# EAGLE board MOD-v2-3a (EAGLE 8.3.1)
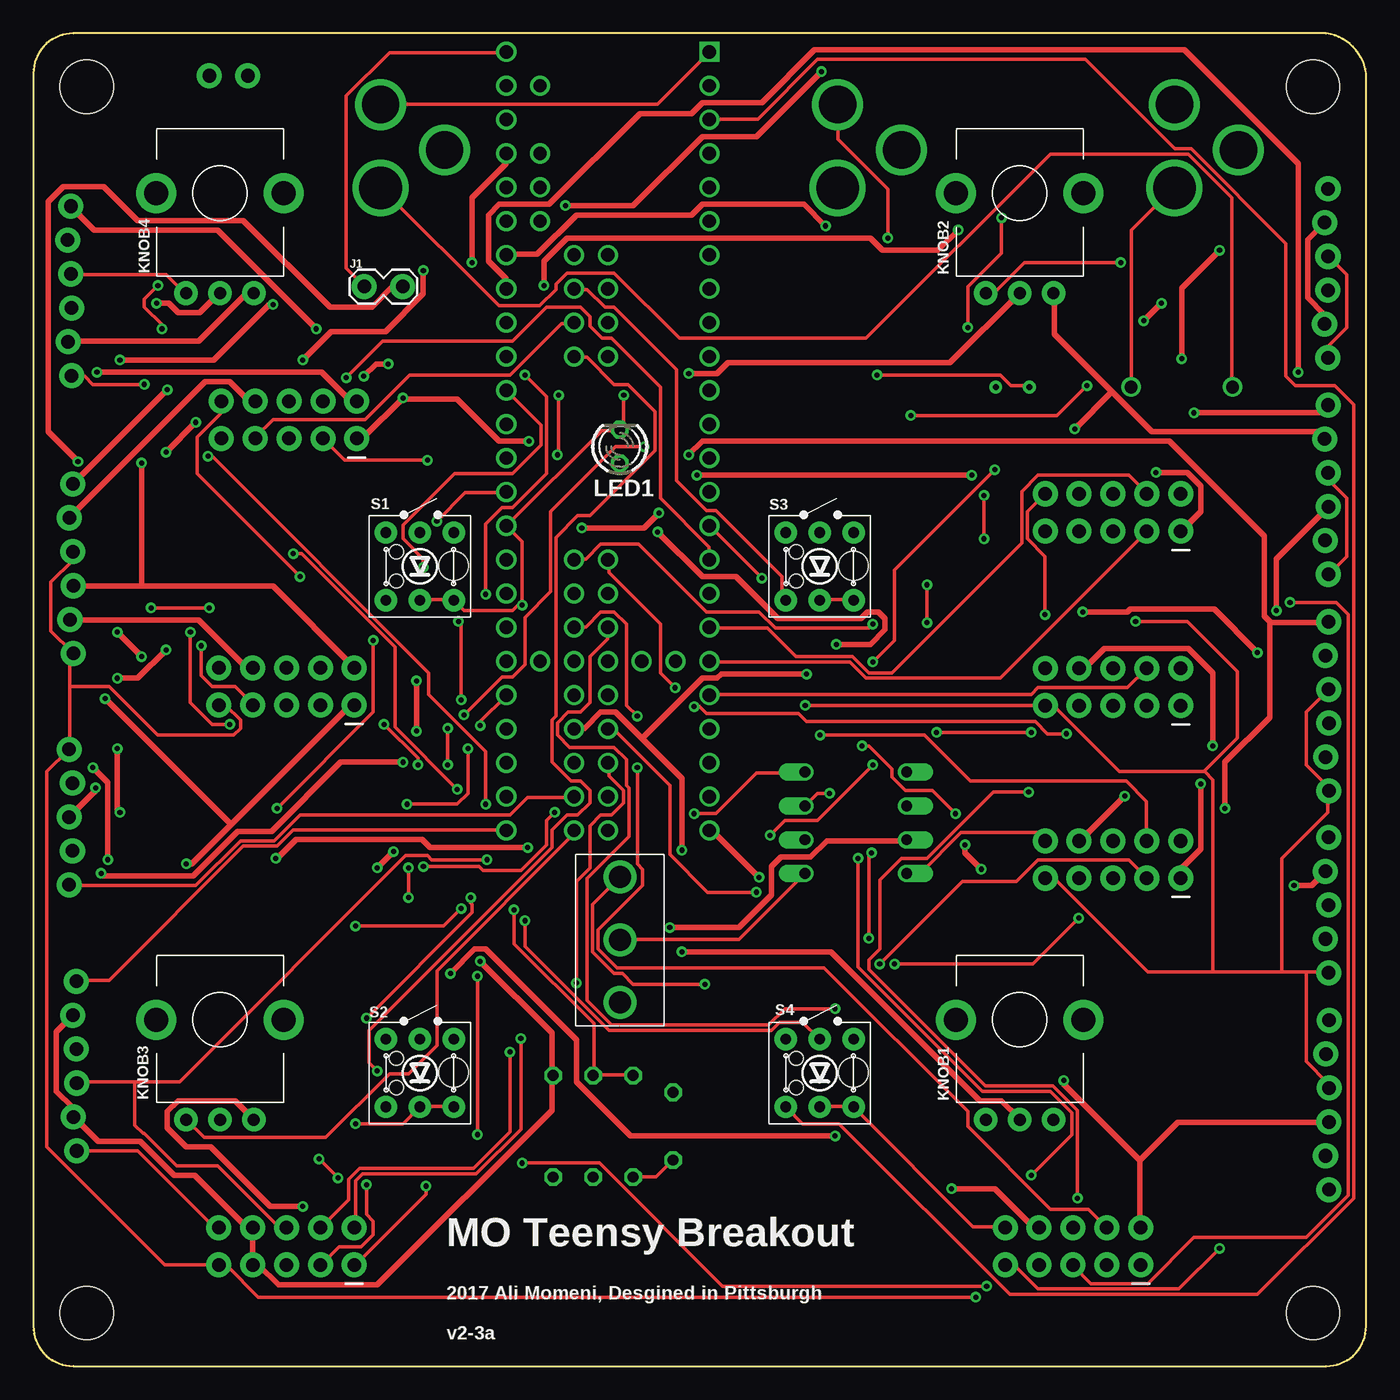
[diagram p0: board, top side]
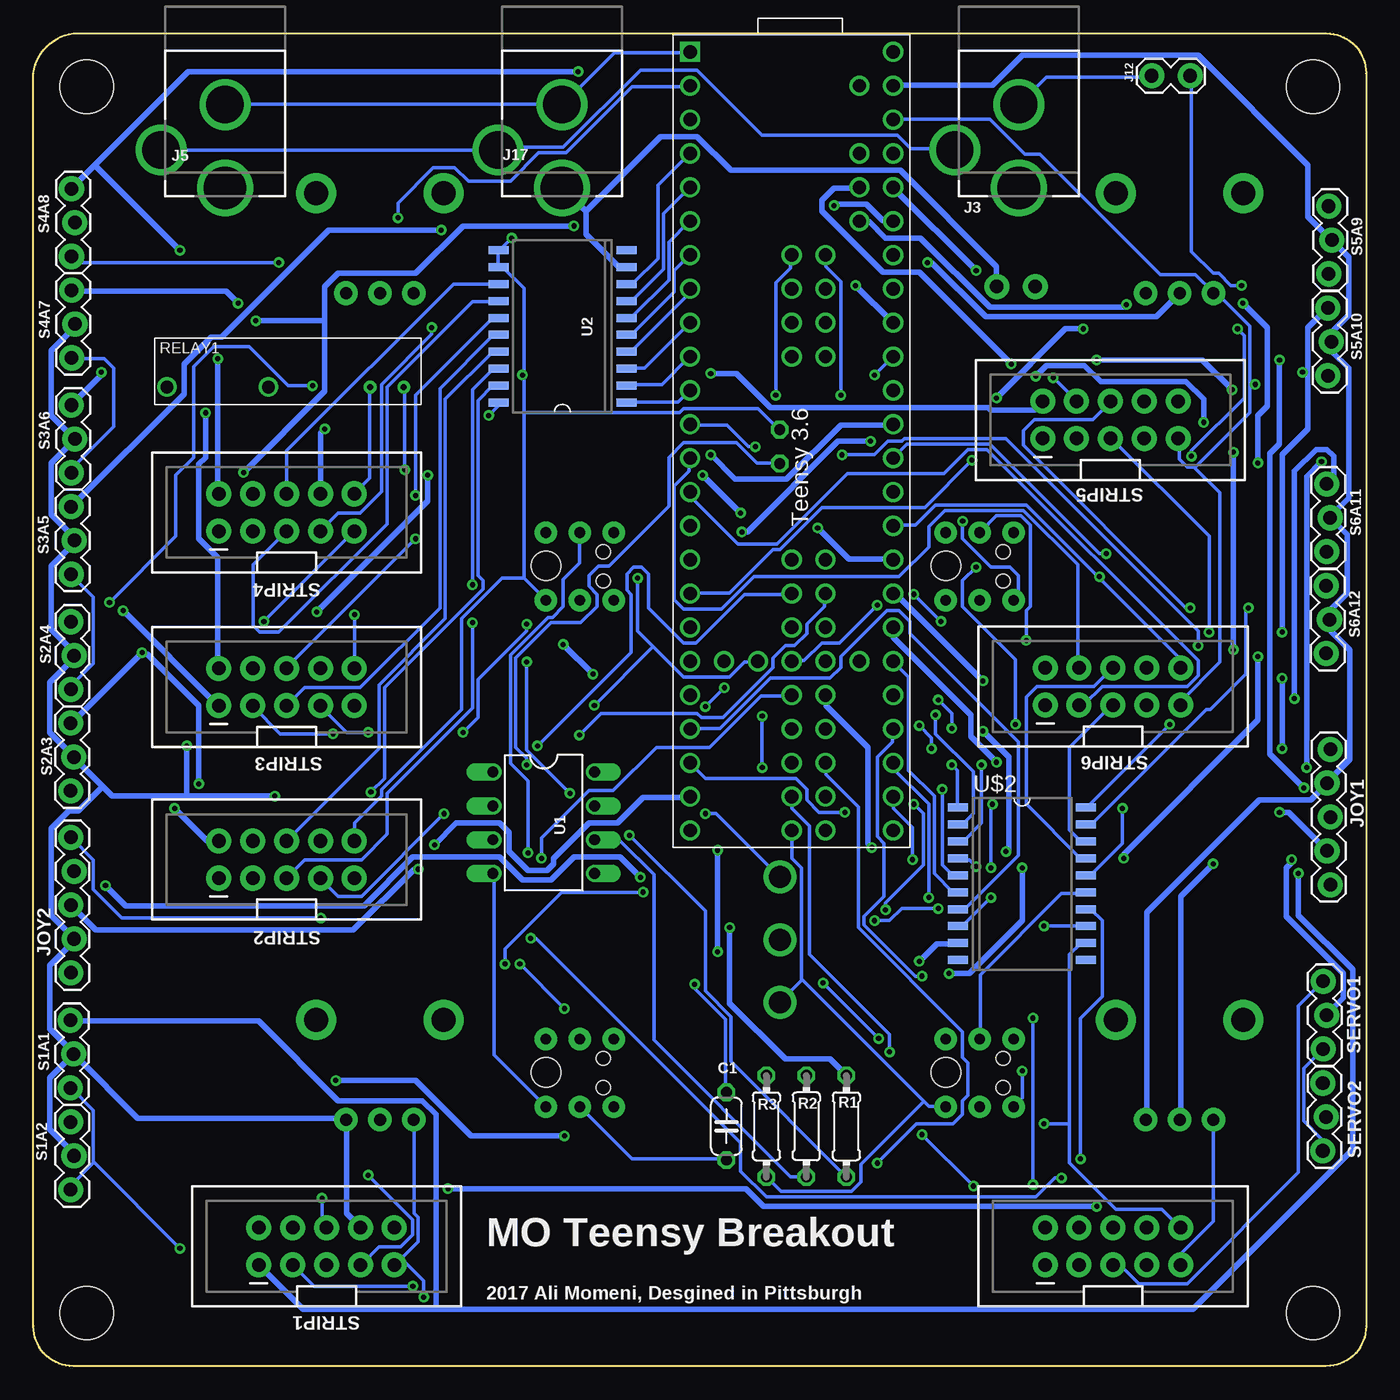
[diagram p1: board, bottom side, seen from below]

Size 100 x 100 mm. Coordinates in mm from the lower left corner, seen from the top.
Outline: 3,100 arc90 0,97 0,3 arc90 3,0 97,0 arc90 100,3 100,97 arc74 97,100 3,100
Copper layers (1*16): Top 0.035559375mm / dielectric 1.501140625mm / Bottom 0.035559375mm
Design rules "typical_4pcb *": minimum track width 10mil, minimum drill 15mil, track to track 6mil, track to pad 10mil, pad to pad 10mil, via to via 10mil, smd to smd 10mil, copper to edge 15mil, drill to drill 8mil, minimum pad ring 10mil, minimum via ring 8mil, stop-mask expansion 4mil, vias tented up to drill 0mil, thermal gap 10mil
Net classes: 2 Power: width 0.406 mm, clearance 0.305 mm; 3 Analog Sig: width 0.406 mm, clearance 0.305 mm
Holes 4 mm at 4,4 96,4 96,96 4,96

## Footprints (pad centres in the part's own frame; a part is rotated, then mirrored left to right if it is on the bottom)
C050-024X044 = drill 0.813 octagon: 1 -2.54,0; 2 2.54,0
1X02_LOCK = drill 1.016 pad 1.88: 1 -0.178,0; 2 2.718,0
DCJACK_2MM_PTH = drill 2.8: GND 0,7.35; GNDBREAK 4.8,10.75 | drill 3.2: PWR 0,13.6
2X5-SHROUDED_LOCK = drill 1.016 pad 1.88: 1 -1.397,5.08; 2 1.397,5.08; 3 -1.397,2.54; 4 1.397,2.54; 5 -1.397,0; 6 1.397,0; 7 -1.397,-2.54; 8 1.397,-2.54; 9 -1.397,-5.08; 10 1.397,-5.08
1X05_LOCK = drill 1.016 pad 1.88: 1 0,0.127; 2 2.54,-0.127; 3 5.08,0.127; 4 7.62,-0.127; 5 10.16,0.127
POT_ALPHA_RD901F-40-(L)R1 = drill 0.9 pad 1.778: 1 -2.54,-7.5; 2 0,-7.5; 3 2.54,-7.5 | drill 1.8 pad 3: M1 -4.8,0; M2 4.8,0
LED3MM = drill 0.813 octagon: A -1.27,0; K 1.27,0
0204/7 = drill 0.813 octagon: 1 -3.81,0; 2 3.81,0
G6DN-1A = drill 0.45: 1 0,0; 2 2.54,0 | drill 0.95: 5 10.16,0; 8 17.78,0
SWITCH_TR2-MOMENTARY-LED = drill 0.8 pad 1.676: 1 2.54,-2.54; 2 2.54,2.54; 3 -2.54,-2.54; 4 -2.54,2.54; A 0,2.54; C 0,-2.54 | hole 2.2: 2.53,0.05 | hole 1.05: -1.76,1.1; -1.76,-1.09
1X03_LOCK = drill 1.016 pad 1.88: 1 0,0.127; 2 2.54,-0.127; 3 5.08,0.127
1X03_LOCK@1 = drill 1.016 pad 1.88: 1 0,0.127; 2 2.54,-0.127; 3 5.08,0.127
SWITCH_SPDT_500SSP1S2M2QEA = drill 1.65: 1 -4.7,0; 2 0,0; 3 4.7,0
TEENSY3-6_NO-USB-HOST = drill 1: 0 3.81,1.27; 1 6.35,1.27; 2 8.89,1.27; 3 11.43,1.27; 3V3(1) 36.83,1.27; 3V3(2) 46.99,6.35; 3V3(3) 6.35,16.51; 3V3(4) 59.69,11.43; 4 13.97,1.27; 5 16.51,1.27; 6 19.05,1.27; 7 21.59,1.27; 8 24.13,1.27; 9 26.67,1.27; 10 29.21,1.27; 11 31.75,1.27; 12 34.29,1.27; 13 34.29,16.51; 14 31.75,16.51; 15 29.21,16.51; 16 26.67,16.51; 17 24.13,16.51; 18 21.59,16.51; 19 19.05,16.51; 20 16.51,16.51; 21 13.97,16.51; 22 11.43,16.51; 23 8.89,16.51; 24 39.37,1.27; 25 41.91,1.27; 26 44.45,1.27; 27 46.99,1.27; 28 49.53,1.27; 29 52.07,1.27; 30 54.61,1.27; 31 57.15,1.27; 32 59.69,1.27; 33 59.69,16.51; 34 57.15,16.51; 35 54.61,16.51; 36 52.07,16.51; 37 49.53,16.51; 38 46.99,16.51; 39 44.45,16.51; 40 39.37,8.89; 41 41.91,8.89; 42 44.45,8.89; 43 49.53,8.89; 44 52.07,8.89; 45 54.61,8.89; 46 57.15,8.89; 47 57.15,11.43; 48 54.61,11.43; 49 52.07,11.43; 50 49.53,11.43; 51 44.45,11.43; 52 41.91,11.43; 53 39.37,11.43; 54 24.13,11.43; 55 21.59,11.43; 56 19.05,11.43; 57 16.51,11.43; A10 11.43,13.97; A11 13.97,13.97; AGND 3.81,16.51; AREF 8.89,13.97; DAC0 41.91,16.51; DAC1 39.37,16.51; DC 21.59,8.89; DD 24.13,8.89; DE 19.05,8.89; G1 46.99,8.89; G2 36.83,16.51; G3 59.69,8.89; G6 16.51,8.89; P 46.99,11.43; R 46.99,13.97; VBAT 46.99,3.81; VIN 1.27,16.51; VUSB 3.81,13.97 | drill 1 square: G0 1.27,1.27
DIL08 = drill 0.813 offset: 1 -3.81,-3.81; 2 -1.27,-3.81; 3 1.27,-3.81; 4 3.81,-3.81; 5 3.81,3.81; 6 1.27,3.81; 7 -1.27,3.81; 8 -3.81,3.81
SOIC20 = smd 0.6 x 1.5: 1 -5.715,-4.8; 2 -4.445,-4.8; 3 -3.175,-4.8; 4 -1.905,-4.8; 5 -0.635,-4.8; 6 0.635,-4.8; 7 1.905,-4.8; 8 3.175,-4.8; 9 4.445,-4.8; 10 5.715,-4.8; 11 5.715,4.8; 12 4.445,4.8; 13 3.175,4.8; 14 1.905,4.8; 15 0.635,4.8; 16 -0.635,4.8; 17 -1.905,4.8; 18 -3.175,4.8; 19 -4.445,4.8; 20 -5.715,4.8

## Placement (x,y rotation side)
C1  10uF  [C050-024X044]  48,18 270 bottom
J1  Teensy-5V  [1X02_LOCK]  25,81 0 top
J3  TO Pi  [DCJACK_2MM_PTH]  26.06,102 180 bottom
J4  ACTUATORS  [2X5-SHROUDED_LOCK]  19,9 90 bottom
J5  +5V (Pi)  [DCJACK_2MM_PTH]  85.61,102 180 bottom
J12  RPi-Shutdown  [1X02_LOCK]  13.38,96.82 180 bottom
J17  +5V (Main)  [DCJACK_2MM_PTH]  60.34,102 180 bottom
JOY1  JOY1  [1X05_LOCK]  2.81,46.28 270 bottom
JOY2  JOY2  [1X05_LOCK]  97.06,29.52 90 bottom
KNOB1  [POT_ALPHA_RD901F-40-(L)R1]  74,26 0 top
KNOB2  [POT_ALPHA_RD901F-40-(L)R1]  74,88 0 top
KNOB3  [POT_ALPHA_RD901F-40-(L)R1]  14,26 0 top
KNOB4  [POT_ALPHA_RD901F-40-(L)R1]  14,88 0 top
LED1  [LED3MM]  44,69 90 top
R1  330  [0204/7]  39,18 270 bottom
R2  2.2K  [0204/7]  42,18 90 bottom
R3  3.3K  [0204/7]  45,18 270 bottom
RELAY1  RELAY-OMRON-G6DN  [G6DN-1A]  72.2,73.46 180 bottom
S1  SW-LEDPTH  [SWITCH_TR2-MOMENTARY-LED]  29,60 0 top
S1A1  AN5  [1X03_LOCK]  97.1,20.88 90 bottom
S1A2  AN6  [1X03_LOCK]  97.08,13.24 90 bottom
S2  SW-LEDPTH  [SWITCH_TR2-MOMENTARY-LED]  29,22 0 top
S2A3  AN7  [1X03_LOCK]  97.08,43.16 90 bottom
S2A4  AN8  [1X03_LOCK]  97.06,50.77 90 bottom
S3  SW-LEDPTH  [SWITCH_TR2-MOMENTARY-LED]  59,60 0 top
S3A5  AN5  [1X03_LOCK]  97.04,59.41 90 bottom
S3A6  AN6  [1X03_LOCK]  97.02,67.03 90 bottom
S4  SW-LEDPTH  [SWITCH_TR2-MOMENTARY-LED]  59,22 0 top
S4A7  AN7  [1X03_LOCK]  97,75.65 90 bottom
S4A8  AN8  [1X03_LOCK]  97.01,83.26 90 bottom
S5A9  AN5  [1X03_LOCK]  2.69,81.95 90 bottom
S5A10  AN6  [1X03_LOCK]  2.74,74.31 90 bottom
S6A11  AN7  [1X03_LOCK]  2.83,61.11 90 bottom
S6A12  AN8  [1X03_LOCK]  2.88,53.47 90 bottom
SERVO1  SERVO1  [1X03_LOCK@1]  3.1,23.79 90 bottom
SERVO2  SERVO2  [1X03_LOCK@1]  3.13,16.16 90 bottom
STRIP1  [2X5-SHROUDED_LOCK]  78,9 90 bottom
STRIP2  [2X5-SHROUDED_LOCK]  81,38.01 90 bottom
STRIP3  [2X5-SHROUDED_LOCK]  81,50.96 90 bottom
STRIP4  [2X5-SHROUDED_LOCK]  81,64.05 90 bottom
STRIP5  [2X5-SHROUDED_LOCK]  19.19,71 90 bottom
STRIP6  [2X5-SHROUDED_LOCK]  19,50.99 90 bottom
SW2  500SSP1S2M2QEA  [SWITCH_SPDT_500SSP1S2M2QEA]  44,32 270 top
TEENSY  TEENSY3_6-ALI_NO-USB-HOST  [TEENSY3-6_NO-USB-HOST]  51.99,99.88 270 bottom
U1  ATTINY85  [DIL08]  61.71,40.77 270 bottom
U2  A2982  [SOIC20]  60.31,78.01 90 bottom
U$2  A2982  [SOIC20]  25.82,36.19 270 bottom

## Library data of the parts
C1 = resistor
J1 = SparkFun-Connectors
J3 J5 J17 = adafruit
J4 STRIP1-STRIP6 = SparkFun-Connectors; PROD_ID: CONN-08671; SF_ID: PRT-08506
J12 = SparkFun-Connectors; GND: GND; SIG: SIG
JOY1 = SparkFun-Connectors; B: B; GND: gnd; H: H; V: V; VCC: vcc
JOY2 = SparkFun-Connectors; B: B; GND: GND; H: H; V: V; VCC: VCC
KNOB1-KNOB4 RELAY1 S1-S4 TEENSY U1 U2 U$2 = CMU-ArtFab
LED1 = led; GND: -; P: +
R1-R3 = rcl
S1A1 = SparkFun-Connectors; AN2: AN2; GND: GND; VCC: VCC
S1A2 = SparkFun-Connectors; AN1: AN1; GND: GND; VCC: VCC
S2A3 = SparkFun-Connectors; AN3: AN3; GND: GND; VCC: VCC
S2A4 = SparkFun-Connectors; AN4: AN4; GND: GND; VCC: VCC
S3A5 = SparkFun-Connectors; AN5: AN5; GND: GND; VCC: VCC
S3A6 = SparkFun-Connectors; AN6: AN6; GND: GND; VCC: VCC
S4A7 = SparkFun-Connectors; AN7: AN7; GND: GND; VCC: VCC
S4A8 = SparkFun-Connectors; AN8: AN8; GND: GND; VCC: VCC
S5A9 = SparkFun-Connectors; AN9: AN9; GND: GND; VCC: VCC
S5A10 = SparkFun-Connectors; AN10: AN10; GND: GND; VCC: VCC
S6A11 = SparkFun-Connectors; AN11: AN11; GND: GND; VCC: VCC
S6A12 = SparkFun-Connectors; AN12: AN12; GND: GND; VCC: VCC
SERVO1 SERVO2 = SparkFun-Connectors; 5V: +5V; GND: GND; SIG: SIG
SW2 = CMU-ArtFab; DIGIKEY: EG5137-ND

## Nets
+3V3: J4.9 JOY1.1 JOY2.1 KNOB1.1 KNOB2.1 KNOB3.1 KNOB4.1 S1A1.1 S1A2.1 S2A3.1 S2A4.1 S3A5.1 S3A6.1 S4A7.1 S4A8.1 S5A9.1 S5A10.1 S6A11.1 S6A12.1 STRIP1.9 STRIP2.9 STRIP3.9 STRIP4.9 STRIP5.9 STRIP6.9 TEENSY.3V3(1) TEENSY.3V3(2) TEENSY.3V3(3) TEENSY.3V3(4)
+5V [Power]: J1.2 J4.7 J4.8 J17.PWR R1.1 SERVO1.2 SERVO2.2 U1.3 U2.9 U$2.9
+5V-BATTERY: C1.1 SW2.1 U1.8
+5V-BATTERY-PI: J5.PWR RELAY1.5
AGND [Analog Sig]: JOY1.2 JOY2.2 KNOB1.3 KNOB2.3 KNOB3.3 KNOB4.3 S1A1.2 S1A2.2 S2A3.2 S2A4.2 S3A5.2 S3A6.2 S4A7.2 S4A8.2 S5A9.2 S5A10.2 S6A11.2 S6A12.2 STRIP1.8 STRIP2.8 STRIP3.8 STRIP4.8 STRIP5.8 STRIP6.8 TEENSY.AGND
AN1 [Analog Sig]: S1A1.3 STRIP1.1 TEENSY.39
AN2 [Analog Sig]: S1A2.3 STRIP1.2 TEENSY.DAC0
AN3 [Analog Sig]: S2A3.3 STRIP2.1 TEENSY.DAC1
AN4 [Analog Sig]: S2A4.3 STRIP2.2 TEENSY.15
AN5 [Analog Sig]: S3A5.3 STRIP3.1 TEENSY.18
AN6 [Analog Sig]: S3A6.3 STRIP3.2 TEENSY.19
AN7 [Analog Sig]: S4A7.3 STRIP4.1 TEENSY.20
AN8 [Analog Sig]: S4A8.3 STRIP4.2 TEENSY.21
AN9 [Analog Sig]: KNOB1.2 S5A9.3 STRIP5.1 TEENSY.49
AN10 [Analog Sig]: KNOB2.2 S5A10.3 STRIP5.2 TEENSY.50
AN11 [Analog Sig]: KNOB3.2 S6A11.3 STRIP6.1 TEENSY.22
AN12 [Analog Sig]: KNOB4.2 S6A12.3 STRIP6.2 TEENSY.23
B1: STRIP1.3 TEENSY.48
B2: STRIP1.4 TEENSY.51
B3: STRIP2.3 TEENSY.42
B4: STRIP2.4 TEENSY.52
B5: STRIP3.3 TEENSY.40
B6: STRIP3.4 TEENSY.28
B7: STRIP4.3 TEENSY.27
B8: STRIP4.4 TEENSY.26
B9: STRIP5.3 TEENSY.25
B10: STRIP5.4 TEENSY.24
B11: STRIP6.3 TEENSY.12
B12: STRIP6.4 TEENSY.11
B13: S1.3 TEENSY.13
B14: S2.3 TEENSY.54
B15: S3.3 TEENSY.56
B16: S4.3 TEENSY.1
GND: C1.2 J3.GND J4.10 J5.GND J12.2 J17.GND LED1.K R3.2 RELAY1.2 S1.1 S1.C S2.1 S2.C S3.1 S3.C S4.1 S4.C SERVO1.1 SERVO2.1 STRIP1.10 STRIP2.10 STRIP3.10 STRIP4.10 STRIP5.10 STRIP6.10 SW2.3 TEENSY.G0 TEENSY.G1 TEENSY.G2 TEENSY.G3 TEENSY.G6 U1.4 U2.11 U2.12 U$2.12
GNDBREAK: J3.GNDBREAK J5.GNDBREAK J17.GNDBREAK
JOYB1: JOY1.5 TEENSY.47
JOYB2: JOY2.5 TEENSY.44
JOYH1 [Analog Sig]: JOY1.3 TEENSY.A11
JOYH2 [Analog Sig]: JOY2.3 TEENSY.31
JOYV1 [Analog Sig]: JOY1.4 TEENSY.A10
JOYV2 [Analog Sig]: JOY2.4 TEENSY.32
LED1: STRIP1.7 TEENSY.43
LED2: STRIP2.7 TEENSY.41
LED3: STRIP3.7 TEENSY.53
LED4: STRIP4.7 TEENSY.0
LED5: STRIP5.7 TEENSY.55
LED6: STRIP6.7 TEENSY.57
M_INA: J4.2 TEENSY.45
M_INB: J4.4 TEENSY.46
M_PWMA: J4.1 TEENSY.36
M_PWMB: J4.3 TEENSY.35
N$2: LED1.A R1.2
N$3: SW2.2 U1.5
N$4: RELAY1.1 U1.7
N$5: J12.1 R2.2 R3.1
N$6: J3.PWR RELAY1.8
N$7: J1.1 TEENSY.VIN
PI-REST: R2.1 U1.6
PWM1: TEENSY.2 U2.8
PWM2: TEENSY.3 U2.7
PWM3: TEENSY.4 U2.6
PWM4: TEENSY.5 U2.5
PWM5: TEENSY.6 U2.4
PWM6: TEENSY.7 U2.3
PWM7: TEENSY.8 U2.2
PWM8: TEENSY.9 U2.1
PWM9: TEENSY.37 U$2.8
PWM10: TEENSY.29 U$2.7
PWM11: TEENSY.38 U$2.6
PWM12: TEENSY.14 U$2.5
PWM13: TEENSY.30 U$2.4
PWM14: TEENSY.16 U$2.3
PWM15: TEENSY.10 U$2.2
PWM16: TEENSY.17 U$2.1
PWM_1: STRIP1.5 U2.20
PWM_2: STRIP1.6 U2.19
PWM_3: STRIP2.5 U2.18
PWM_4: STRIP2.6 U2.17
PWM_5: STRIP3.5 U2.16
PWM_6: STRIP3.6 U2.15
PWM_7: STRIP4.5 U2.14
PWM_8: STRIP4.6 U2.13
PWM_9: STRIP5.5 U$2.20
PWM_10: STRIP5.6 U$2.19
PWM_11: STRIP6.5 U$2.18
PWM_12: STRIP6.6 U$2.17
PWM_13: S1.A U$2.16
PWM_14: S2.A U$2.15
PWM_15: S3.A U$2.14
PWM_16: S4.A U$2.13
S1: J4.5 SERVO1.3 TEENSY.33
S2: J4.6 SERVO2.3 TEENSY.34

## Tracks (layer width: path | path; a pad name or v marks a point on that pad's centre or on a via)
+3V3  (via drill 0.38)
  Top 0.254: TEENSY.3V3(4) 40.54,40.13 40.54,39.93 30.28,29.67 30.28,24.08 28.14,21.95 26.72,21.95 21.95,17.17 12.8,17.17 11.48,18.49 KNOB3.1 | 2.74,51 2.74,53.24 2.95,53.44 S6A12.1 2.95,53.54 1.32,55.17 1.32,58.83 2.95,60.45 2.95,61.06 S6A11.1 | 2.74,51 2.74,46.33 JOY1.1 2.64,46.23 1.02,44.6 1.02,16.46 9.86,7.62 13.92,7.62 J4.9 14.02,7.52 14.53,7.52 16.87,5.18 v70.71,5.18 | 2.74,51 5.69,51 9.35,47.35 15.04,47.35 15.54,47.85 15.54,48.46 14.43,49.58 14.02,49.58 STRIP6.9 | v8.33,73.66 4.47,73.66 3.86,74.27 2.95,74.27 S5A10.1 | S5A9.1 2.85,81.89 9.96,81.89 11.38,80.47 KNOB4.1 | S2A4.1 97.13,50.7 95.5,49.07 95.5,45.11 97.13,43.48 97.13,43.18 S2A3.1 97.13,43.08 97.13,41.55 93.67,38.1 93.67,29.57 | S3A6.1 97.23,66.95 97.23,66.45 98.55,65.13 98.55,60.76 97.23,59.44 S3A5.1 | v81.58,82.8 74.37,82.8 72.14,80.57 71.53,80.57 KNOB2.1 | S4A7.1 97.13,75.69 97.13,76.5 98.55,77.93 98.55,81.89 97.23,83.21 S4A8.1 | v54.66,59.13 50.8,62.99 TEENSY.3V3(1) | 95.5,29.57 97.13,29.57 JOY2.1 | 95.5,29.57 93.67,29.57 | 93.67,29.57 88.49,29.57 | 88.49,29.57 83.62,29.57 76.61,36.58 76,36.58 STRIP2.9 | 87.88,44.6 81.48,44.6 76.61,49.48 76,49.48 STRIP3.9 75.89,49.58 v57.91,49.58 | 87.88,44.6 88.49,43.99 88.49,29.57 | v82.7,55.88 86.56,55.88 90.32,52.12 90.32,47.14 87.88,44.7 87.88,44.6 | 95.5,29.57 95.5,22.86 97.13,21.23 97.13,20.93 S1A1.1 | v89,8.84 85.95,5.79 75.39,5.79 73.66,7.52 72.95,7.52 STRIP1.9
  Bottom 0.254: J4.9 13.92,7.62 13.92,8.43 11.48,10.87 11.48,18.49 KNOB3.1 | TEENSY.3V3(3) 35.46,93.57 28.25,93.57 25.6,90.93 24.49,90.93 15.44,81.89 12.8,81.89 11.48,80.57 KNOB4.1 11.38,80.47 11.18,80.47 8.74,78.03 8.74,73.66 | 12.8,67.46 13.41,67.46 14.02,68.07 14.02,69.6 STRIP5.9 | 12.8,67.46 8.74,71.53 8.74,73.66 | 8.74,73.66 v8.33,73.66 | STRIP6.9 13.92,49.68 13.92,49.89 10.97,52.83 10.97,65.53 12.8,67.36 12.8,67.46 | S2A4.1 97.13,50.8 97.13,51.1 95.5,52.73 95.5,57.71 97.13,59.33 S3A5.1 | v81.58,82.8 96.72,82.8 97.13,83.21 S4A8.1 | S3A6.1 97.13,67.06 97.13,67.36 93.98,70.51 93.98,74.88 94.69,75.59 97.03,75.59 S4A7.1 | 53.49,54 54.66,55.17 v54.66,59.13 | 53.49,54 51.21,51.71 47.75,51.71 46.63,52.83 45.72,52.83 TEENSY.3V3(2) | KNOB1.1 71.42,18.49 71.42,11.48 71.12,11.18 71.12,9.35 72.85,7.62 STRIP1.9 72.34,8.03 70.71,6.4 v70.71,5.18 | 95.5,15.24 97.13,13.61 97.13,13.31 S1A2.1 | 95.5,15.24 95.5,19.2 97.13,20.83 S1A1.1 | v82.7,55.88 76,62.59 STRIP4.9 | v89,8.84 95.4,15.24 95.5,15.24 | v57.91,49.58 53.49,54
+5V  (via drill 0.38)
  Top 0.406: SERVO1.2 2.95,26.31 1.73,25.09 1.73,20.62 2.95,19.41 2.95,18.8 SERVO2.2 3.15,18.59 4.88,16.87 8.03,16.87 10.57,14.33 12.09,14.33 16.05,10.36 16.26,10.36 J4.8 16.46,10.36 16.46,7.62 J4.7 16.66,7.62 16.87,7.62 18.39,6.1 25.81,6.1 38.91,19.2 38.91,21.64 R1.1 38.91,21.84 38.91,24.99 v33.53,30.38 | v47.75,32.92 52.93,32.92 55.37,35.36 55.37,37.49 56.08,38.2 58.32,38.2 59.54,39.42 65.43,39.42 U1.3 | v3.35,67.87 1.12,70.1 1.12,87.38 2.23,88.49 5.28,88.49 7.82,85.95 15.75,85.95 22.25,79.45 25.4,79.45 26.92,80.97 27.64,80.97 J1.2 | v4.47,44.91 5.59,43.79 v5.59,38
  Bottom 0.406: 58.52,86.67 58.52,84.94 56.08,82.5 55.58,82.5 U2.9 | 58.52,86.67 60.25,88.39 J17.PWR | 58.52,86.67 52.93,92.25 50.19,92.25 47.65,89.71 34.95,89.71 27.74,82.5 27.74,81.08 J1.2 | v33.53,30.38 32.21,31.7 30.68,31.7 U$2.9 | v47.75,32.92 47.75,27.23 43.59,23.06 40.23,23.06 39.01,21.84 R1.1 | v3.35,67.87 4.47,66.75 v4.47,44.91 | v5.59,38 5.59,37.8 5.99,37.39 5.99,33.73 1.73,29.46 1.73,27.64 2.95,26.42 SERVO1.2
+5V-BATTERY  (via drill 0.38)
  Top 0.254: v50.39,28.65 45.01,28.65 44.2,29.46 43.59,29.46 41.96,31.09 41.96,34.65 43.99,36.68 SW2.1 | v49.58,41.45 51.21,41.45 54.25,44.5 57.81,44.5 U1.8
  Bottom 0.254: v50.39,28.65 50.39,28.35 48.06,26.01 48.06,20.62 C1.1 | v49.58,41.45 48.77,41.45 44.09,36.78 SW2.1
+5V-BATTERY-PI
  Top 0.254: RELAY1.5 82.4,73.56 82.4,85.24 85.55,88.39 J5.PWR
AGND  (via drill 0.38)
  Top 0.406: v81.89,42.77 78.54,39.42 STRIP2.8 | v88.49,46.53 88.49,52.02 86.67,53.85 80.37,53.85 78.94,52.43 78.54,52.43 STRIP3.8 | S4A7.2 96.83,78.23 96.83,78.94 95.61,80.16 95.61,84.53 96.83,85.75 S4A8.2 | 80.92,73.1 83.92,70.1 96.32,70.1 96.83,69.6 S3A6.2 | 80.92,73.1 76.61,77.42 76.61,80.47 KNOB2.3 | 80.92,73.1 v78.13,70.31 | KNOB4.3 16.46,80.47 15.95,80.47 12.39,76.91 2.64,76.91 S5A10.2 | STRIP6.8 16.46,52.43 15.95,52.43 12.39,55.98 2.85,55.98 S6A12.2 | STRIP5.8 16.56,72.44 16.15,72.44 14.73,73.86 12.9,73.86 2.74,63.7 S6A11.2 | v68.89,13.31 72.14,13.31 74.98,10.46 75.39,10.46 STRIP1.8 | v20.22,11.99 17.78,11.99 13.31,16.46 11.48,16.46 10.06,17.88 10.06,19.1 10.87,19.91 15.14,19.91 16.46,18.59 KNOB3.3
  Bottom 0.406: STRIP1.8 75.49,10.46 76.5,11.48 76.5,18.49 KNOB1.3 76.71,18.59 92.15,18.59 96.83,23.27 S1A1.2 | S1A2.2 97.03,15.85 97.03,16.05 98.75,17.78 98.75,21.64 97.03,23.37 S1A1.2 | S1A1.2 97.03,23.57 98.75,25.3 98.75,30.07 97.03,31.8 97.03,32 JOY2.2 97.03,32.21 98.65,33.83 98.65,40.34 97.33,41.66 96.62,41.66 94.79,43.48 | 88.49,42.77 94.08,42.77 94.79,43.48 | 88.49,42.77 v81.89,42.77 | 94.79,43.48 96.93,45.62 S2A3.2 97.03,45.82 98.75,47.55 98.75,51.31 97.03,53.03 97.03,53.24 S2A4.2 97.03,53.44 97.03,53.65 98.65,55.27 98.65,60.05 96.93,61.77 S3A5.2 96.93,61.98 96.93,62.18 98.65,63.91 98.65,67.77 96.93,69.49 S3A6.2 97.03,69.7 98.65,71.32 98.65,76.2 96.93,77.93 96.93,78.13 S4A7.2 | 88.49,42.77 v88.49,46.53 | v78.13,70.31 78.44,70 78.44,65.53 STRIP4.8 | TEENSY.AGND 35.46,96.11 28.04,96.11 25.81,98.35 12.6,98.35 4.37,90.12 4.37,86.26 2.64,84.53 S5A9.2 2.44,84.33 1.32,83.21 1.32,78.84 2.54,77.62 2.54,76.91 S5A10.2 2.54,76.71 2.54,76.1 1.32,74.88 1.32,65.13 2.64,63.8 S6A11.2 2.64,63.6 1.42,62.38 1.42,58.01 2.74,56.69 2.74,56.08 S6A12.2 2.64,55.88 2.64,55.17 1.22,53.75 1.22,45.52 2.85,43.89 JOY1.2 2.95,43.69 4.17,42.47 8.03,42.47 16.46,34.04 16.46,18.59 KNOB3.3 | v68.89,13.31 46.53,13.31 45.21,11.99 v20.22,11.99
AN1  (via drill 0.38)
  Top 0.406: v27.74,45.31 23.06,45.31 17.88,40.13 15.34,40.13 11.99,36.78 5.28,36.78 v5.08,36.98
  Bottom 0.406: v27.74,45.31 29.67,47.24 29.67,48.87 35.46,54.66 35.46,55.37 TEENSY.39 | v5.08,36.98 5.08,33.83 1.02,29.77 1.02,16.26 13.01,4.27 69.8,4.27 | 69.8,4.27 79.76,4.27 83.01,7.52 STRIP1.1 | 69.8,4.27 69.8,18.9 70.81,19.91 77.11,19.91 83.11,25.91 97.13,25.91 S1A1.3
AN2  (via drill 0.38)
  Top 0.406: v28.75,47.65 v28.75,51.41 | v25.81,37.39 v27.03,38.61 | v31.29,29.46 33.12,31.29 33.93,31.29 40.74,24.49 40.74,21.34 44.81,17.27 v60.15,17.27 | v77.32,21.44 77.32,21.13 83.01,15.44 | 83.01,15.44 83.01,10.46 STRIP1.2 | 83.01,15.44 85.85,18.29 97.13,18.29 S1A2.3
  Bottom 0.406: v28.75,51.41 35.26,57.91 35.46,57.91 TEENSY.DAC0 | v28.75,47.65 26.82,45.72 26.82,38.81 v27.03,38.61 | v25.81,37.39 25.81,33.43 29.77,29.46 v31.29,29.46 | v60.15,17.27 67.16,17.27 71.32,21.44 v77.32,21.44
AN3  (via drill 0.38)
  Top 0.406: v41.15,62.89 45.82,62.89 v46.94,64.01 | v70.41,66.85 v49.78,66.85 | v78.74,56.59 82.09,56.59 82.3,56.79 88.59,56.79 v91.85,53.54 | v87.58,43.69 87.58,38.81 86.16,37.39 86.16,36.68 STRIP2.1
  Bottom 0.406: v41.15,62.89 38.81,60.55 35.56,60.55 TEENSY.DAC1 | v49.78,66.85 v46.94,64.01 | v70.41,66.85 70.41,64.92 v78.74,56.59 | S2A3.3 97.13,48.26 v91.85,53.54 91.75,53.44 91.44,53.44 87.58,49.58 v87.58,43.69
AN4  (via drill 0.38)
  Top 0.406: v49.17,68.38 50.19,69.39 85.24,69.39 92.35,62.28 92.35,56.29 92.86,55.78 | 92.86,55.78 97.13,55.78 S2A4.3 | v89.41,41.86 89.41,45.31 92.76,48.67 92.76,55.68 92.86,55.78
  Bottom 0.406: v49.17,68.38 47.35,66.55 43.48,66.55 39.42,70.61 35.56,70.61 TEENSY.15 | v89.41,41.86 86.97,39.42 86.16,39.42 STRIP2.2
AN5  (via drill 0.38)
  Top 0.406: v38.3,81.08 38.3,82.91 40.03,84.63 62.79,84.63 63.7,83.72 67.87,83.72 v69.39,85.24 | v93.27,56.69 93.27,60.55 97.13,64.41 S3A5.3
  Bottom 0.406: v38.3,81.08 35.56,78.33 TEENSY.18 | v69.39,85.24 77.83,85.24 85.85,77.22 86.67,77.22 88.7,75.18 88.7,72.95 97.13,64.52 S3A5.3 | v93.27,56.69 86.16,49.58 STRIP3.1
AN6  (via drill 0.38)
  Top 0.406: v94.89,74.57 94.89,90.22 86.36,98.75 58.62,98.75 54.66,94.79 50.19,94.79 49.38,93.98 45.52,93.98 38.71,87.17 34.95,87.17 34.14,86.36 34.14,82.91 35.46,81.58 35.46,80.87 TEENSY.19 | v87.07,71.53 96.62,71.53 97.13,72.03 S3A6.3
  Bottom 0.406: v94.89,74.57 94.89,74.37 97.13,72.14 S3A6.3 | v87.07,71.53 87.07,68.17 87.58,67.67 87.58,62.08 86.16,60.66 86.16,52.43 STRIP3.2
AN7  (via drill 0.38)
  Top 0.406: v59.44,85.55 57.81,87.17 50.19,87.17 49.38,86.36 40.74,86.36 37.8,83.41 35.56,83.41 TEENSY.20 | v84.23,67.06 86.56,67.06 87.58,66.04 87.58,64.11 86.16,62.69 STRIP4.1 | v83.31,78.44 v84.63,79.76
  Bottom 0.406: v59.44,85.55 67.77,85.55 71.32,81.99 77.11,81.99 78.13,80.97 78.13,78.44 | 78.13,78.44 78.13,73.15 v84.23,67.06 | v84.63,79.76 85.55,80.67 97.03,80.67 S4A7.3 | 78.13,78.44 v83.31,78.44
AN8  (via drill 0.38)
  Top 0.406: v39.93,87.07 45.01,87.07 50.19,92.25 54.25,92.25 v59.13,97.13 | v86.16,75.59 86.16,80.87 v89,83.72
  Bottom 0.406: v39.93,87.07 39.83,87.17 37.49,87.17 36.27,85.95 35.56,85.95 TEENSY.21 | v59.13,97.13 88.39,97.13 95.4,90.12 | 95.4,90.12 97.13,88.39 S4A8.3 | v86.16,75.59 86.16,65.53 STRIP4.2 | 95.4,90.12 v89,83.72
AN9  (via drill 0.38)
  Top 0.406: v21.23,77.83 13.82,85.24 4.57,85.24 2.85,86.97 S5A9.3 | STRIP5.1 24.28,69.7 24.79,69.7 v27.74,72.64 27.84,72.54 31.8,72.54 34.95,69.39 v37.19,69.39 | 45.67,47.09 48.67,44.09 v48.67,38.71 | 45.67,47.09 43.69,49.07 42.57,49.07 41.35,47.85 40.64,47.85 TEENSY.49 | v48.67,31.09 59.84,31.09 71.02,19.91 72.64,19.91 73.97,18.59 KNOB1.2 | v46.84,62.59 50.19,59.23 52.73,59.23 55.88,56.08 62.08,56.08 62.59,56.59 63.4,56.59 63.91,56.08 63.91,55.27 62.79,54.15 v60.25,54.15 | v58.01,51.92 51.61,51.92 51.31,51.61 50.19,51.61 45.67,47.09
  Bottom 0.406: v27.74,72.64 22.55,77.83 v21.23,77.83 | v48.67,31.09 v48.67,38.71 | v37.19,69.39 39.62,69.39 46.43,62.59 v46.84,62.59 | v58.01,51.92 v60.25,54.15
AN10  (via drill 0.38)
  Top 0.406: v49.17,74.47 51.31,74.47 52.12,75.29 68.78,75.29 73.97,80.47 KNOB2.2 | v37.08,38.91 29.77,38.91 29.16,39.52 19.71,39.52 18.29,38.1 v18.19,38.1 | v6.3,55.07 v8.13,53.24 | v4.78,74.57 21.64,74.57 23.77,72.44 24.18,72.44 STRIP5.2
  Bottom 0.406: v49.17,74.47 47.24,74.47 44.7,71.93 28.35,71.93 28.14,71.73 24.89,71.73 24.28,72.34 STRIP5.2 | v37.08,38.91 37.39,39.22 37.39,46.43 40.54,49.58 40.54,50.29 TEENSY.50 | v18.19,38.1 18.19,38.41 8.13,48.46 v8.13,53.24 | v6.3,55.07 6.3,68.38 4.37,70.31 4.37,74.57 | 4.37,74.57 4.37,77.93 2.95,79.35 S5A10.3 | 4.37,74.57 v4.78,74.57
AN11  (via drill 0.38)
  Top 0.406: v11.48,37.69 11.89,37.69 14.83,40.64 | 14.83,40.64 23.77,49.58 STRIP6.1 | v29.26,82.19 29.26,80.47 26.42,77.62 22.35,77.62 v20.22,75.49 | v10.06,73.25 3.05,66.24 S6A11.3 | v5.38,50.09 14.83,40.64
  Bottom 0.406: v11.48,37.69 13.92,35.26 13.92,18.59 KNOB3.2 | v29.26,82.19 35.46,88.39 TEENSY.22 | v20.22,75.49 12.29,75.49 v10.06,73.25 | v5.38,50.09 5.38,67.16 3.76,68.78 2.95,68.78 2.44,68.28 2.44,66.75 2.95,66.24 S6A11.3
AN12  (via drill 0.38)
  Top 0.406: 8.13,58.52 17.98,58.52 24.08,52.43 STRIP6.2 | 8.13,58.52 3.05,58.52 S6A12.3 | v32.92,82.8 32.92,87.68 35.46,90.22 35.46,90.93 TEENSY.23 | v8.13,67.77 8.13,58.52 | v9.25,79.76 10.16,79.76 10.87,79.05 12.5,79.05 13.92,80.47 KNOB4.2
  Bottom 0.406: v32.92,82.8 32.61,82.8 28.55,78.74 15.75,78.74 14.02,80.47 KNOB4.2 | v8.13,67.77 8.13,71.32 7.42,72.03 7.42,77.93 v9.25,79.76
B1  (via drill 0.38)
  Top 0.254: v36.68,15.24 42.47,15.24 51.71,5.99 v71.53,5.99
  Bottom 0.254: v36.68,15.24 33.73,18.19 30.99,18.19 30.28,18.9 30.28,19.91 29.87,20.32 29.87,22.76 30.28,23.16 30.28,25.09 38.1,32.92 38.1,41.96 40.54,44.4 40.54,45.21 TEENSY.48 | v71.53,5.99 78.94,5.99 80.47,7.52 STRIP1.3
B2  (via drill 0.38)
  Top 0.254: v45.31,48.77 44.5,49.58 44.5,55.68 43.59,56.59 42.57,56.59 41.45,55.47 40.64,55.47 TEENSY.51 | v45.31,44.91 45.31,37.69 45.72,37.29 45.72,36.07 42.37,32.72 42.37,31.29 43.79,29.87 59.33,29.87 70.1,19.1 70.1,17.98 76.3,11.79 79.15,11.79 80.47,10.46 STRIP1.4
  Bottom 0.254: v45.31,44.91 v45.31,48.77
B3  (via drill 0.38)
  Top 0.254: v60.15,26.82 56.39,26.82 55.17,25.6 43.38,25.6 41.55,27.43 41.55,36.58 44.7,39.73 44.7,43.38 44.5,43.59 44.5,45.52 43.59,46.43 40.23,46.43 39.32,47.35 39.32,48.26 40.13,49.07 41.05,49.07 41.76,49.78 41.76,53.24 43.08,54.56 43.08,55.37 TEENSY.42 | v63.5,30.18 69.7,36.37 73.76,36.37 75.39,38 82.19,38 83.52,36.68 STRIP2.3
  Bottom 0.254: v63.5,30.18 v60.15,26.82
B4  (via drill 0.38)
  Top 0.254: v59.03,47.35 66.85,47.35 70.31,43.89 81.99,43.89 83.52,42.37 83.52,39.42 STRIP2.4
  Bottom 0.254: v59.03,47.35 57.4,48.97 50.19,48.97 49.89,48.67 48.26,48.67 44.5,52.43 44.5,53.14 43.59,54.05 42.88,54.05 41.96,54.97 41.96,55.68 40.64,57 40.64,57.91 TEENSY.52
B5  (via drill 0.38)
  Top 0.254: v48.16,50.9 47.04,52.02 47.04,55.68 43.18,59.54 43.18,60.45 TEENSY.40 | v49.58,49.48 49.99,49.48 50.49,48.97 57.4,48.97 58.01,48.36 75.18,48.36 76.1,47.45 v77.52,47.45
  Bottom 0.254: v49.58,49.48 v48.16,50.9 | v77.52,47.45 81.48,47.45 83.52,49.48 STRIP3.3
B6
  Top 0.254: TEENSY.28 50.8,50.39 74.88,50.39 75.39,50.9 82.09,50.9 83.52,52.32 STRIP3.4
B7
  Top 0.254: TEENSY.27 50.8,52.83 61.27,52.83 62.48,51.61 72.54,51.61 83.52,62.59 STRIP4.3
B8
  Top 0.254: TEENSY.26 50.8,55.37 55.07,55.37 57.2,53.24 61.47,53.24 62.69,52.02 64.41,52.02 74.17,61.77 74.17,65.63 75.39,66.85 82.19,66.85 83.52,65.53 STRIP4.4
B9  (via drill 0.38)
  Top 0.254: v29.57,67.97 23.37,67.97 21.74,69.6 STRIP5.3
  Bottom 0.254: v29.57,67.97 33.12,64.41 40.84,64.41 43.99,61.27 44.5,61.27 47.75,58.01 50.7,58.01 TEENSY.25
B10  (via drill 0.38)
  Top 0.254: v23.47,74.17 26.21,76.91 35.97,76.91 38.51,79.45 41.05,79.45 41.76,78.74 41.76,78.03 42.67,77.11 43.38,77.11 47.04,73.46 47.04,65.13 50.7,61.47 50.7,60.55 TEENSY.24
  Bottom 0.254: v23.47,74.17 21.74,72.44 STRIP5.4
B11
  Bottom 0.254: TEENSY.12 50.7,65.53 50.7,65.23 47.14,61.67 44.2,61.67 38.91,66.95 31.7,66.95 29.87,68.78 28.45,68.78 12.6,52.93 12.6,51.82 13.41,51 19.81,51 21.13,49.68 21.54,49.68 STRIP6.3
B12
  Bottom 0.254: TEENSY.11 50.8,68.07 50.8,67.16 51.92,66.04 51.92,57.51 51.21,56.79 48.36,56.79 45.92,59.23 35.05,59.23 32.82,61.47 32.82,62.99 31.6,64.21 25.7,64.21 21.64,60.15 21.64,52.43 STRIP6.4
B13  (via drill 0.38)
  Top 0.254: v30.28,63.4 32.41,65.53 35.46,65.53 TEENSY.13
  Bottom 0.254: v30.28,63.4 30.28,62.08 28.14,59.94 26.72,59.94 26.11,59.33 26.11,57.81 26.42,57.51 S1.3
B14  (via drill 0.38)
  Top 0.254: v25.81,22.15 25.2,22.76 25.2,25.2 38.91,38.91 38.91,40.23 40.03,41.35 40.84,41.35 41.76,42.27 41.76,43.18 41.05,43.89 40.34,43.89 38.91,45.31 38.91,48.46 39.22,48.77 39.22,62.18 40.84,63.8 41.76,63.8 46.63,68.68 46.63,71.63 44.6,73.66 43.59,73.66 41.55,75.69 40.64,75.69 TEENSY.54
  Bottom 0.254: v25.81,22.15 25.81,20.12 26.42,19.51 S2.3
B15
  Top 0.254: TEENSY.56 40.64,80.77 41.55,80.77 42.88,79.45 43.59,79.45 48.26,74.78 48.26,66.45 50.49,64.21 51.21,64.21 56.19,59.23 56.19,57.71 56.39,57.51 S3.3
B16
  Top 0.254: TEENSY.1 50.8,93.57 54.36,93.57 58.83,98.04 78.94,98.04 85.65,91.34 86.87,91.34 93.98,84.23 93.98,74.27 94.69,73.56 97.64,73.56 99.06,72.14 99.06,12.6 91.85,5.38 73.25,5.38 60.45,18.19 57.71,18.19 56.49,19.41 S4.3
GND  (via drill 0.38)
  Top 0.254: SERVO2.1 3.35,16.15 7.82,16.15 13.51,10.46 13.92,10.46 J4.10 | S2.1 31.5,19.51 29.06,19.51 S2.C 28.96,19.41 27.74,18.19 v24.18,18.19 | U1.4 65.53,36.98 66.55,36.98 69.6,40.03 75.29,40.03 75.89,39.42 STRIP2.10 | R3.2 45.01,14.22 46.74,14.22 47.95,15.44 C1.2 | S4.C 59.03,19.51 61.47,19.51 S4.1 61.57,19.41 70.51,10.46 72.85,10.46 STRIP1.10 | J3.GND 26.11,94.69 46.84,94.69 50.7,98.55 TEENSY.G0 | v75.89,56.39 75.89,60.76 74.57,62.08 74.57,64.11 75.89,65.43 STRIP4.10 | S3.C 59.03,57.51 61.47,57.51 S3.1 | v63.3,74.37 72.54,74.37 73.36,73.56 74.68,73.56 RELAY1.2 | S1.C 29.06,57.51 31.5,57.51 S1.1 31.6,57.4 32.31,56.69 35.97,56.69 36.37,57.1 v36.68,57.1 36.68,61.87 35.56,62.99 TEENSY.G2 35.56,63.09 42.67,70.21 43.99,70.21 LED1.K 44.09,70.31 44.3,70.51 v44.3,72.85 | v20.02,59.23 12.29,66.95 12.29,69.7 14.02,71.42 14.02,72.34 STRIP5.10 | v64.11,84.63 64.11,88.29 60.35,92.05 60.35,94.59 J17.GND
  Bottom 0.254: SERVO2.1 3.35,16.26 3.35,17.07 4.67,18.39 4.67,22.35 3.25,23.77 SERVO1.1 | 22.25,18.19 22.25,15.24 18.8,11.79 15.34,11.79 14.02,10.46 J4.10 | 22.25,18.19 22.25,30.89 21.44,31.7 21.03,31.7 U$2.12 | 42.37,28.96 42.37,37.39 43.08,38.1 43.08,40.13 TEENSY.G3 | 42.37,28.96 43.99,27.33 SW2.3 | 33.17,19.86 42.27,28.96 42.37,28.96 | 33.17,19.86 32.82,19.51 31.6,19.51 S2.1 | C1.2 48.06,15.54 55.07,15.54 58.93,19.41 S4.C | U1.4 65.43,36.88 65.43,23.37 61.57,19.51 S4.1 | 33.17,19.86 37.9,15.14 37.9,13.82 38.61,13.11 43.89,13.11 44.91,14.12 R3.2 | v24.18,18.19 22.25,18.19 | J12.2 16.15,96.72 23.98,96.72 26.01,94.69 J3.GND | TEENSY.G0 50.8,98.55 56.39,98.55 60.25,94.69 J17.GND 60.45,94.69 85.55,94.69 J5.GND | RELAY1.2 74.78,73.46 74.78,66.65 75.89,65.53 STRIP4.10 | v75.89,56.39 75.89,52.43 STRIP3.10 | 63.2,59.13 63.2,71.53 | 63.2,71.53 63.2,74.37 | 63.2,74.37 63.2,80.87 64.72,82.4 65.02,82.4 U2.12 65.13,82.5 65.13,83.72 U2.11 65.02,83.72 v64.11,84.63 | 63.2,59.13 61.57,57.51 S3.1 | v63.3,74.37 63.2,74.37 | v36.68,57.1 39.52,54.25 40.84,54.25 42.16,52.93 43.08,52.93 TEENSY.G1 | v44.3,72.85 44.3,81.28 43.18,82.4 43.18,83.31 TEENSY.G6 | 20.07,59.18 25.5,64.62 32.31,64.62 33.83,63.09 35.46,63.09 TEENSY.G2 | 20.07,59.18 14.02,53.14 14.02,52.43 STRIP6.10 | v20.02,59.23 20.07,59.18 | 63.2,71.53 51.51,71.53 51.21,71.83 45.62,71.83 44.09,70.31 LED1.K | 63.2,59.13 64.82,59.13 67.87,56.08 67.87,49.28 73.86,43.28 73.86,42.77 75.89,40.74 75.89,39.42 STRIP2.10
GNDBREAK
  Bottom 0.254: J3.GNDBREAK 30.89,91.34 34.14,91.34 35.15,92.35 45.31,92.35 50.19,97.23 54.46,97.23 60.25,91.44 65.02,91.44 65.13,91.34 J17.GNDBREAK 65.23,91.24 90.32,91.24 J5.GNDBREAK
JOYB1
  Top 0.254: TEENSY.47 40.54,42.67 37.08,42.67 35.76,41.35 20.02,41.35 18.09,39.42 15.54,39.42 12.19,36.07 2.74,36.07 JOY1.5
JOYB2  (via drill 0.38)
  Top 0.254: v54.25,35.56 50.6,35.56 47.75,38.41 47.75,43.59 43.59,47.75 43.18,47.75 TEENSY.44 | v64.62,30.18 74.98,30.18 v78.44,33.63
  Bottom 0.254: v54.25,35.56 60.35,35.56 64.62,31.29 v64.62,30.18 | v78.44,33.63 93.37,33.63 95.5,35.76 95.5,38 97.13,39.62 JOY2.5
JOYH1  (via drill 0.38)
  Top 0.406: v17.98,79.65 17.68,79.65 13.51,75.49 v6.5,75.49 | v4.67,43.38 4.67,43.18 2.74,41.25 JOY1.3
  Bottom 0.406: v17.98,79.65 18.19,79.45 28.25,79.45 33.43,84.63 36.07,84.63 37.29,85.85 38,85.85 TEENSY.A11 | v6.5,75.49 6.5,69.19 7.21,68.48 7.21,45.92 v4.67,43.38
JOYH2  (via drill 0.38)
  Top 0.406: v69.9,39.12 69.9,38.51 v71.12,37.29
  Bottom 0.406: v69.9,39.12 68.28,40.74 65.02,40.74 64.31,40.03 64.31,38.61 62.89,37.19 61.47,37.19 60.96,37.69 60.96,38.1 58.32,40.74 56.19,40.74 54.25,42.67 50.8,42.67 TEENSY.31 | v71.12,37.29 71.42,37.29 76,32.72 95.3,32.72 97.13,34.54 JOY2.3
JOYV1  (via drill 0.38)
  Top 0.406: v26.62,75.18 25.7,75.18 v24.79,74.27 | v9.96,68.58 v12.19,70.81 | v9.96,53.75 7.82,51.61 v6.3,51.61 | v6.3,46.33 6.3,41.76 v6.5,41.55
  Bottom 0.406: v26.62,75.18 33.53,82.09 36.27,82.09 40.84,86.67 40.84,87.48 39.93,88.39 38.1,88.39 TEENSY.A10 | v24.79,74.27 23.98,75.08 21.13,75.08 19.91,73.86 13.51,73.86 12.19,72.54 v12.19,70.81 | v9.96,53.75 v9.96,68.58 | v6.3,46.33 v6.3,51.61 | v6.5,41.55 5.79,41.55 2.95,38.71 JOY1.4
JOYV2  (via drill 0.38)
  Top 0.406: v54.46,36.68 51,40.13 50.8,40.13 TEENSY.32 | v94.59,36.07 95.91,36.07 96.93,37.08 JOY2.4
  Bottom 0.406: v54.46,36.68 55.98,38.2 59.44,38.2 61.16,36.47 63.3,36.47 65.02,38.2 71.53,38.2 75.18,34.54 93.07,34.54 v94.59,36.07
LED1  (via drill 0.38)
  Top 0.254: v61.87,38.1 61.87,29.97 71.22,20.62 76.3,20.62 77.93,19 77.93,17.37 v74.88,14.33
  Bottom 0.254: v61.87,38.1 61.87,39.62 58.32,43.18 56.49,43.18 53.24,46.43 49.28,46.43 45.41,50.29 43.18,50.29 TEENSY.43 | v74.88,14.33 71.53,10.97 71.53,9.86 72.44,8.94 74.07,8.94 75.39,7.62 STRIP1.7
LED2  (via drill 0.38)
  Top 0.254: v62.18,46.53 62.69,46.53 64.41,44.81 64.41,44.2 65.43,43.18 67.46,43.18 v69.19,41.45
  Bottom 0.254: v62.18,46.53 55.17,53.54 55.17,57.91 55.47,58.22 55.47,59.44 54.97,59.94 54.36,59.94 53.85,59.44 53.85,56.9 51.21,54.25 50.29,54.25 46.63,57.91 43.18,57.91 TEENSY.41 | v69.19,41.45 75.39,35.26 77.11,35.26 78.44,36.58 STRIP2.7
LED3  (via drill 0.38)
  Top 0.254: v62.99,55.68 62.69,55.37 55.68,55.37 54.46,56.59 50.49,56.59 45.41,61.67 42.57,61.67 41.45,60.55 40.64,60.55 TEENSY.53 | v74.88,47.55 v67.77,47.55
  Bottom 0.254: v62.99,55.68 62.99,55.17 66.65,51.51 66.65,48.67 v67.77,47.55 | v74.88,47.55 76.5,47.55 78.44,49.48 STRIP3.7
LED4  (via drill 0.38)
  Top 0.254: v72.64,86.16 72.64,83.52 70.1,80.97 v70.1,77.93
  Bottom 0.254: v72.64,86.16 72.64,87.27 70,89.92 68.38,89.92 67.36,88.9 64.21,88.9 62.08,91.03 60.05,91.03 55.07,96.01 50.8,96.01 TEENSY.0 | v70.1,77.93 70.1,77.42 73.86,73.66 73.86,65.63 75.49,64.01 77.11,64.01 78.44,62.69 STRIP4.7
LED5
  Top 0.254: TEENSY.55 40.54,78.23 39.62,78.23 35.76,74.37 28.25,74.37 24.89,71.02 17.98,71.02 16.66,69.7 STRIP5.7
LED6  (via drill 0.38)
  Top 0.254: v39.42,72.85 39.42,68.48 v39.32,68.38 | v12.6,54.05 12.6,51.82 13.41,51 15.14,51 16.46,49.68 STRIP6.7
  Bottom 0.254: v39.42,72.85 39.42,81.38 40.54,82.5 40.54,83.31 TEENSY.57 | v39.32,68.38 36.88,68.38 35.87,69.39 34.85,69.39 34.65,69.6 27.03,69.6 12.6,55.17 v12.6,54.05
M_INA  (via drill 0.38)
  Top 0.254: v40.74,28.75 40.74,36.37 41.76,37.39 41.76,40.54 42.57,41.35 43.38,41.35 44.3,42.27 44.3,43.18 43.18,44.3 43.18,45.21 TEENSY.45 | v36.58,24.59 36.58,17.78 33.22,14.43 24.69,14.43 24.18,13.92 24.18,10.46 J4.2
  Bottom 0.254: v36.58,24.59 v40.74,28.75
M_INB  (via drill 0.38)
  Top 0.254: v35.76,23.57 35.76,17.58 33.02,14.83 24.49,14.83 23.67,14.02 23.67,12.5 21.64,10.46 J4.4
  Bottom 0.254: v35.76,23.57 35.76,24.89 41.76,30.89 41.76,40.54 43.08,41.86 43.08,42.67 TEENSY.46
M_PWMA  (via drill 0.38)
  Top 0.254: v33.33,17.37 v33.33,29.26 | v29.46,13.51 29.46,12.9 24.18,7.62 J4.1
  Bottom 0.254: v33.33,29.26 33.83,29.26 37.69,33.12 37.69,33.73 36.17,35.26 36.17,39.22 36.68,39.73 36.68,45.72 35.56,46.84 35.56,47.75 TEENSY.36 | v29.46,13.51 v33.33,17.37
M_PWMB  (via drill 0.38)
  Top 0.254: v32.82,35.15 32.82,34.75 32.92,34.65 32.92,34.04 v24.99,26.11 | v24.99,13.61 24.99,11.38 25.5,10.87 25.5,9.86 24.59,8.94 22.96,8.94 21.64,7.62 J4.3
  Bottom 0.254: v32.82,35.15 32.82,42.16 35.46,44.81 35.46,45.21 TEENSY.35 | v24.99,13.61 v24.99,26.11
N$2  (via drill 0.38)
  Top 0.254: v55.27,39.83 56.39,40.95 58.83,40.95 v62.99,45.11
  Bottom 0.254: v55.27,39.83 49.58,34.14 49.58,28.14 47.65,26.21 47.65,22.86 39.01,14.22 R1.2 | v62.99,45.11 62.99,45.62 63.8,46.43 63.8,53.14 61.16,55.78 58.93,55.78 57.71,57 57.71,57.91 58.32,58.52 58.32,59.33 57.61,60.05 56.79,60.05 52.32,64.52 52.32,68.17 51.21,69.29 47.24,69.29 45.72,67.77 44.09,67.77 LED1.A
N$3
  Top 0.254: U1.5 57.81,36.88 52.93,32 44.09,32 SW2.2
N$4  (via drill 0.38)
  Top 0.254: v72.14,67.26 64.62,59.74 64.62,54.46 v62.99,52.83 | v59.74,42.98 58.83,42.98 57.91,42.06 U1.7
  Bottom 0.254: v72.14,67.26 72.14,73.46 RELAY1.1 | v62.99,52.83 62.99,46.23 v59.74,42.98
N$5  (via drill 0.38)
  Top 0.254: R3.1 44.91,21.84 42.06,21.84 R2.2 42.06,21.95 42.06,25.7 36.07,31.7 v36.07,34.24 | v33.93,42.16 33.93,46.13 29.67,50.39 29.67,52.02 13.41,68.28 v13.11,68.28 | v9.65,77.83 9.65,78.13 8.33,79.45 8.33,80.06 v9.35,81.08
  Bottom 0.254: v36.07,34.24 36.07,34.75 33.22,37.59 33.22,41.45 v33.93,42.16 | v13.11,68.28 13.11,68.68 9.14,72.64 9.14,77.32 v9.65,77.83 | v9.35,81.08 10.16,81.08 11.07,81.99 11.48,81.99 13.11,83.62 13.11,96.72 J12.1
N$6
  Top 0.254: RELAY1.8 89.92,73.56 89.92,87.68 86.67,90.93 76.3,90.93 62.48,77.11 48.46,77.11 43.59,81.99 40.03,81.99 39.22,81.18 39.22,80.77 38,79.55 34.95,79.55 26.11,88.39 J3.PWR
N$7
  Top 0.254: TEENSY.VIN 35.46,98.55 26.72,98.55 23.47,95.3 23.47,82.4 24.79,81.08 J1.1
PI-REST
  Bottom 0.254: R2.1 42.06,14.22 43.18,14.22 53.44,24.49 53.44,36.88 55.98,39.42 57.81,39.42 U1.6
PWM1
  Bottom 0.254: U2.8 55.47,81.28 54.97,81.28 53.14,83.11 53.14,88.59 50.8,90.93 TEENSY.2
PWM2
  Bottom 0.254: U2.7 55.47,79.96 55.07,79.96 52.73,82.3 52.73,86.46 50.8,88.39 TEENSY.3
PWM3
  Bottom 0.254: U2.6 55.47,78.74 55.07,78.74 52.32,81.48 52.32,84.33 50.8,85.85 TEENSY.4
PWM4
  Bottom 0.254: U2.5 55.47,77.42 55.07,77.42 51.92,80.57 51.92,82.19 50.8,83.31 TEENSY.5
PWM5
  Bottom 0.254: U2.4 55.47,76.2 55.07,76.2 50.8,80.47 50.8,80.77 TEENSY.6
PWM6
  Bottom 0.254: U2.3 55.47,74.88 54.15,74.88 50.8,78.23 TEENSY.7
PWM7
  Bottom 0.254: U2.2 55.47,73.66 52.83,73.66 50.8,75.69 TEENSY.8
PWM8
  Bottom 0.254: U2.1 55.47,72.34 51.61,72.34 50.8,73.15 TEENSY.9
PWM9  (via drill 0.38)
  Top 0.254: v28.14,37.39 v28.14,35.15 | v28.04,42.16 31.8,42.16 32.61,42.98 v32.61,46.33 | v33.53,48.06 33.53,48.36 35.46,50.29 TEENSY.37
  Bottom 0.254: v28.14,35.15 30.28,33.02 30.58,33.02 U$2.8 | v28.14,37.39 28.14,42.06 v28.04,42.16 | v32.61,46.33 32.61,47.14 v33.53,48.06
PWM10
  Bottom 0.254: U$2.7 30.58,34.34 30.07,34.34 26.11,38.3 26.11,46.84 34.24,54.97 34.24,55.88 35.05,56.69 35.97,56.69 39.42,53.24 39.42,52.43 40.23,51.61 44.7,51.61 48.46,47.85 50.7,47.85 TEENSY.29
PWM11
  Bottom 0.254: U$2.6 30.68,35.56 30.99,35.56 32.41,36.98 32.41,42.77 34.34,44.7 34.34,51.71 35.46,52.83 TEENSY.38
PWM12  (via drill 0.38)
  Top 0.254: v31.8,43.28 27.13,47.95 27.13,53.95 20.12,60.96 v19.51,60.96
  Bottom 0.254: v31.8,43.28 31.8,37.59 31.09,36.88 30.68,36.88 U$2.5 | v19.51,60.96 20.02,60.96 28.25,69.19 34.44,69.19 35.46,68.17 TEENSY.14
PWM13  (via drill 0.38)
  Top 0.254: v29.26,37.49 33.43,37.49 33.73,37.19 36.58,37.19 38.51,39.12 38.51,40.95 v39.12,41.55
  Bottom 0.254: v29.26,37.49 29.77,38 30.58,38 U$2.4 | v39.12,41.55 41.05,41.55 41.96,42.47 41.96,43.28 42.77,44.09 49.58,44.09 50.7,45.21 TEENSY.30
PWM14  (via drill 0.38)
  Top 0.254: v28.85,45.11 28.85,45.62 v26.31,48.16 | v29.26,59.94 29.26,60.55 27.74,62.08 27.74,63.09 31.6,66.95 35.97,66.95 38.1,69.09 38.1,70.61 35.56,73.15 TEENSY.16
  Bottom 0.254: v28.85,45.11 28.85,40.74 30.18,39.42 30.58,39.42 U$2.3 | v26.31,48.16 26.31,53.03 30.28,57 30.28,58.93 v29.26,59.94
PWM15  (via drill 0.38)
  Top 0.254: v32.31,48.87 35.15,51.71 35.97,51.71 36.88,52.63 36.88,56.19 38.81,58.12 38.81,64.11 43.69,68.99 v45.82,68.99
  Bottom 0.254: v32.31,48.87 32.31,47.45 29.46,44.6 29.46,41.45 30.28,40.64 30.58,40.64 U$2.2 | v45.82,68.99 46.33,68.99 47.95,70.61 50.7,70.61 TEENSY.10
PWM16  (via drill 0.38)
  Top 0.254: v31.09,47.85 v31.09,45.11 | v32.11,49.99 32.11,55.68 v31.9,55.88 | v33.93,57.91 33.93,63.2 35.15,64.41 35.97,64.41 38.51,66.95 38.51,72.75 v36.88,74.37
  Bottom 0.254: v31.09,45.11 30.68,44.7 30.68,41.96 U$2.1 | v31.09,47.85 31.09,48.97 v32.11,49.99 | v33.93,57.91 v31.9,55.88 | v36.88,74.37 35.56,75.69 TEENSY.17
PWM_1  (via drill 0.38)
  Top 0.254: v65.84,71.32 76.81,71.32 v79.05,73.56 | v94.28,57.3 97.74,57.3 98.65,56.39 98.65,12.8 95.5,9.65 87.07,9.65 83.62,6.2 79.35,6.2 78.03,7.52 STRIP1.5
  Bottom 0.254: v65.84,71.32 65.13,72.03 65.13,72.24 U2.20 | v79.05,73.56 80.87,73.56 83.82,76.5 86.46,76.5 87.99,74.98 87.99,68.17 89.31,66.85 89.31,62.28 v94.28,57.3
PWM_2  (via drill 0.38)
  Top 0.254: v74.68,43.08 72.03,43.08 67.06,38.1 65.13,38.1 63.5,36.47 63.5,31.29 62.69,30.48 62.69,29.77 71.42,21.03 76.5,21.03 78.33,19.2 v78.33,12.6
  Bottom 0.254: v74.68,43.08 73.66,44.09 73.66,50.9 66.24,58.32 66.24,58.93 66.65,59.33 66.65,72.44 65.53,73.56 65.13,73.56 U2.19 | v78.33,12.6 78.33,10.77 78.03,10.46 STRIP1.6
PWM_3  (via drill 0.38)
  Top 0.254: v67.06,55.78 v67.06,58.62
  Bottom 0.254: v67.06,58.62 67.06,73.25 65.53,74.78 65.13,74.78 U2.18 | v67.06,55.78 67.06,49.38 73.46,42.98 73.46,39.93 75.39,38 79.65,38 80.97,36.68 STRIP2.5
PWM_4
  Bottom 0.254: U2.17 65.13,76.1 65.53,76.1 69.09,72.54 69.09,56.08 74.07,51.1 74.07,46.33 80.97,39.42 STRIP2.6
PWM_5
  Bottom 0.254: U2.16 65.13,77.32 65.53,77.32 69.49,73.36 69.49,56.9 75.49,50.9 79.65,50.9 80.97,49.58 STRIP3.5
PWM_6  (via drill 0.38)
  Top 0.254: v71.32,62.08 v71.32,65.33
  Bottom 0.254: v71.32,65.33 71.32,72.85 65.53,78.64 65.13,78.64 U2.15 | v71.32,62.08 80.97,52.43 STRIP3.6
PWM_7
  Bottom 0.254: U2.14 65.13,79.86 67.06,79.86 73.46,73.46 73.46,63.2 81.58,55.07 83.01,55.07 83.52,55.58 83.52,60.15 81.08,62.59 STRIP4.5
PWM_8
  Bottom 0.254: U2.13 65.13,81.18 68.48,81.18 80.97,68.68 80.97,65.53 STRIP4.6
PWM_9  (via drill 0.38)
  Top 0.254: v14.73,48.16 13.41,48.16 11.79,49.78 v11.79,55.07
  Bottom 0.254: v14.73,48.16 20.93,41.96 U$2.20 | v11.79,55.07 11.79,62.28 19.1,69.6 STRIP5.5
PWM_10  (via drill 0.38)
  Top 0.254: v13.21,56.9 v8.84,56.9
  Bottom 0.254: v8.84,56.9 9.04,56.69 9.04,51.92 11.68,49.28 11.99,49.28 20.62,40.64 20.93,40.64 U$2.19 | v13.21,56.9 13.51,56.9 25.7,69.09 25.7,70.21 24.89,71.02 20.52,71.02 19.2,72.34 STRIP5.6
PWM_11
  Bottom 0.254: U$2.18 21.03,39.42 21.44,39.42 22.25,40.23 22.25,46.43 19.1,49.58 STRIP6.5
PWM_12
  Bottom 0.254: U$2.17 21.44,38.1 25.5,42.16 25.5,50.19 24.69,51 20.42,51 19.1,52.32 STRIP6.6
PWM_13  (via drill 0.38)
  Top 0.254: v18.29,41.86 25.5,49.07 v25.5,54.46
  Bottom 0.254: v18.29,41.86 18.29,39.22 20.62,36.88 20.93,36.88 U$2.16 | v25.5,54.46 25.5,56.69 25.2,57 25.2,63.09 25.91,63.8 27.74,63.8 28.96,62.59 S1.A
PWM_14
  Bottom 0.254: U$2.15 21.03,35.46 22.86,35.46 28.96,29.36 28.96,24.59 S2.A
PWM_15  (via drill 0.38)
  Top 0.254: v22.86,14.12 v21.44,15.54 | v62.69,32.11 62.69,38.3 v62.89,38.51
  Bottom 0.254: v21.44,15.54 21.44,26.11 19.81,27.74 19.81,33.43 20.62,34.24 20.93,34.24 U$2.14 | v22.86,14.12 23.37,14.12 24.79,12.7 45.01,12.7 46.94,14.63 46.94,16.76 62.28,32.11 v62.69,32.11 | v62.89,38.51 62.89,43.89 64.21,45.21 64.21,53.34 61.37,56.19 61.06,56.19 60.25,57 60.25,59.03 59.03,60.25 59.03,62.48 S3.A
PWM_16  (via drill 0.38)
  Top 0.254: v24.18,33.02 30.79,33.02 v32.11,34.34 | v36.88,33.43 36.88,31.5 43.18,25.2 55.37,25.2 55.98,25.81 57.71,25.81 58.93,24.59 S4.A
  Bottom 0.254: v24.18,33.02 U$2.13 | v32.11,34.34 34.85,34.34 35.76,33.43 v36.88,33.43
S1
  Top 0.254: TEENSY.33 35.46,40.23 19.51,40.23 18.29,39.01 15.75,39.01 5.69,28.96 3.25,28.96 SERVO1.3
  Bottom 0.254: J4.5 19,7.52 18.39,7.52 17.07,6.2 13.41,6.2 5.08,14.53 5.08,27.03 3.25,28.85 SERVO1.3
S2  (via drill 0.38)
  Top 0.254: v34.04,38 29.87,38 29.57,38.3 27.94,38.3 10.97,21.34 7.62,21.34 | 7.62,21.34 3.35,21.34 SERVO2.3 | 7.62,21.34 7.62,18.09 8.23,17.48 8.33,17.48 10.77,15.04 13.82,15.04 18.39,10.46 19,10.46 J4.6
  Bottom 0.254: v34.04,38 34.04,40.44 35.46,41.86 35.46,42.67 TEENSY.34

## Text on the board
tPlace: MO Teensy Breakout | 2017 Ali Momeni, Desgined in Pittsburgh | v2-3a
bPlace: MO Teensy Breakout | 2017 Ali Momeni, Desgined in Pittsburgh